# EAGLE board Bulk Board 3 (EAGLE 8.2.0)
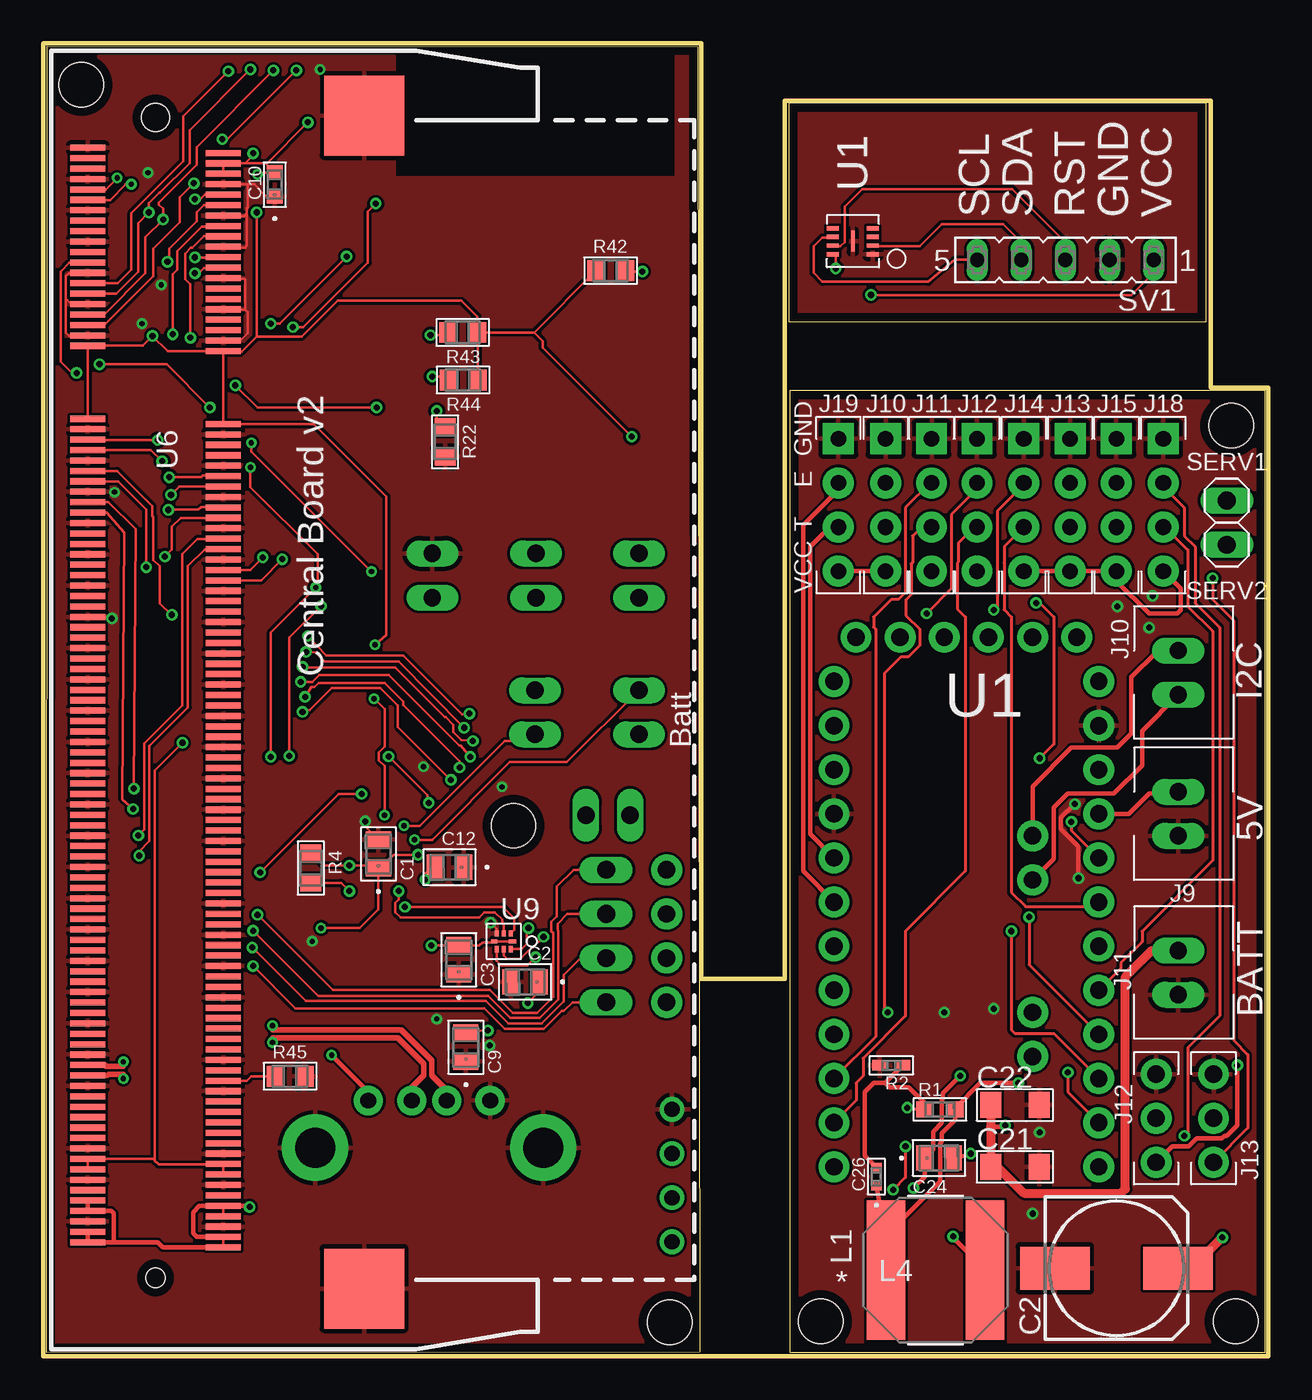
[diagram p0: board, top side]
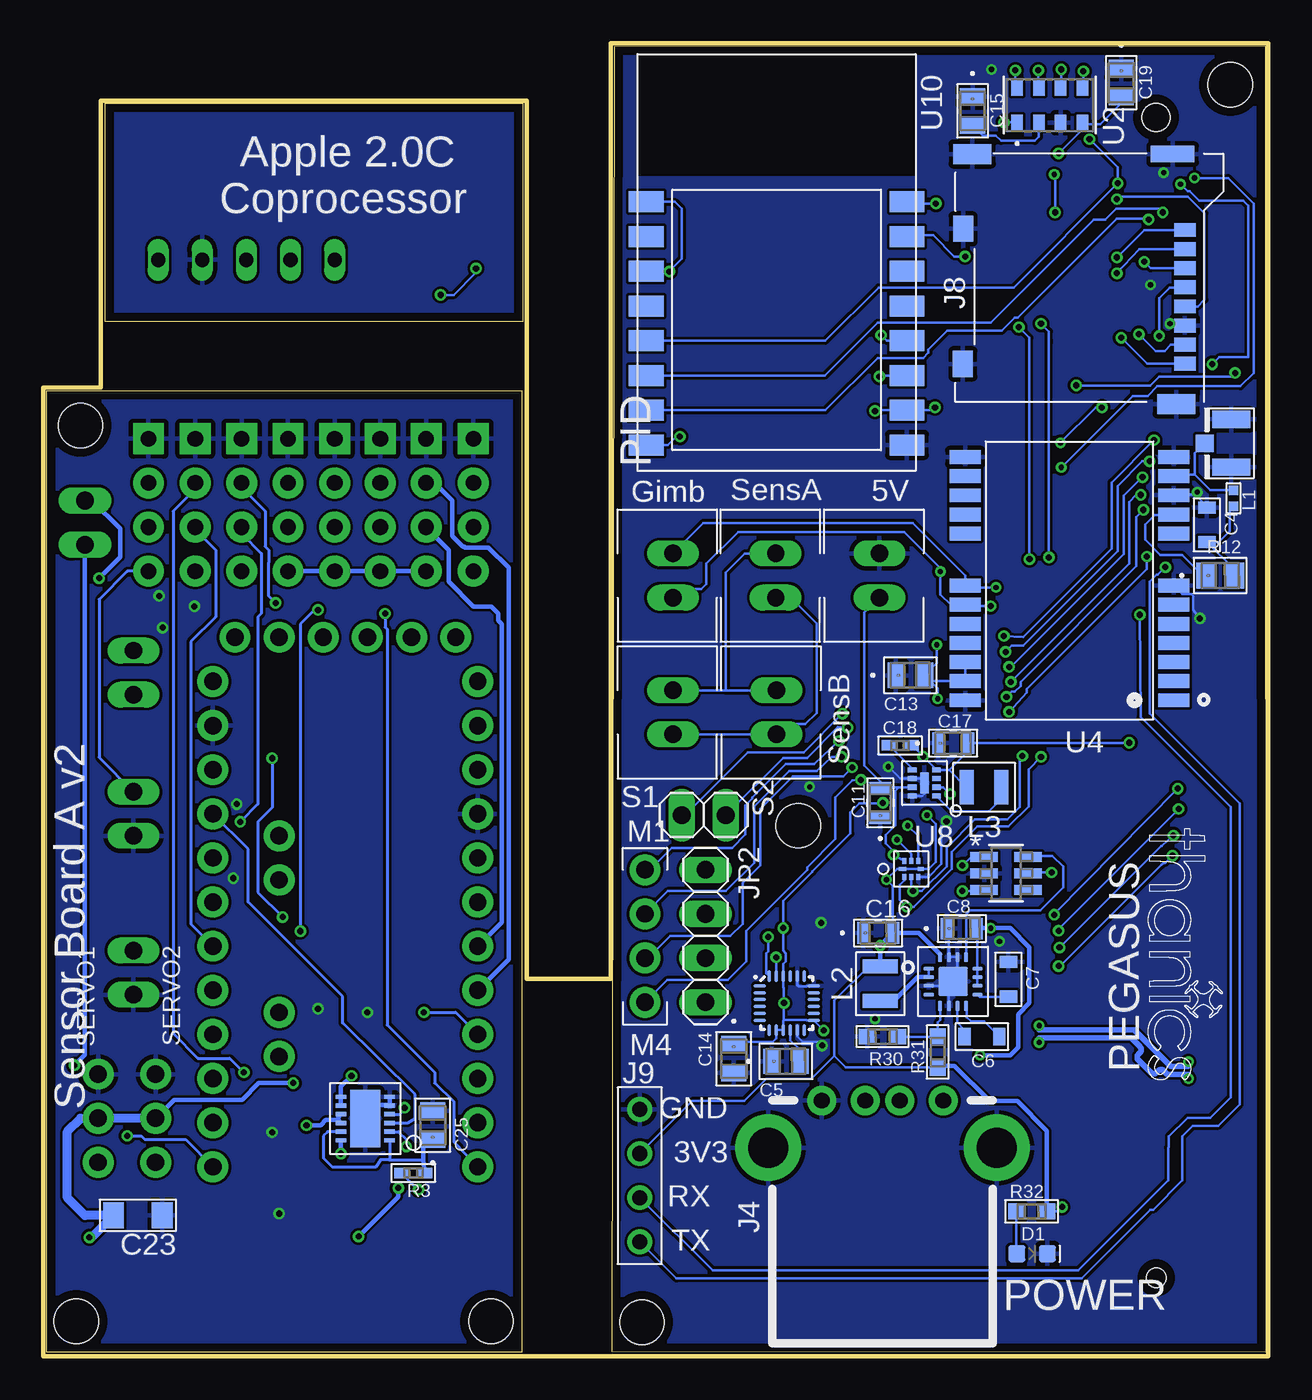
[diagram p1: board, bottom side, seen from below]

Size 70.48 x 75.56 mm. Coordinates in mm from the lower left corner, seen from the top.
Outline: 0.15,0.23 37.77,0.25 37.64,75.39 0.18,75.41 0.15,0.23
Outline: 42.95,0.23 70.31,0.23 70.31,55.59 42.95,55.59 42.95,0.23
Outline: 66.93,59.56 66.93,72.12 42.89,72.12 42.89,59.56 66.93,59.56
Outline: 0,0 70.48,0 70.48,55.75 67.18,55.75 67.18,72.26 42.67,72.26 42.67,21.72 37.85,21.72 37.85,75.56 0,75.56 0,0
Copper layers (1*16): Top 0.035mm / dielectric 1.6mm / Bottom 0.035mm
Design rules "Elecrow_2-layer_PCB_eagle_rule": minimum track width 6mil, minimum drill 12mil, track to track 6mil, track to pad 6mil, pad to pad 6mil, via to via 8mil, smd to smd 0mil, copper to edge 20mil, drill to drill 10mil, minimum pad ring 6mil, minimum via ring 6mil, stop-mask expansion 0mil, vias tented up to drill 100mil, thermal gap 10mil
Holes 2.54 mm at 36.04,1.96 27.05,30.53 2.18,73.18 68.61,2.01 68.35,53.57 44.73,2.01

## Footprints (pad centres in the part's own frame; a part is rotated, then mirrored left to right if it is on the bottom)
0805 = smd 0.965 x 1.448: 1 -0.826,0; 2 0.826,0
0603_CAPACITOR = smd 0.701 x 1.001: 1 -1.001,0; 2 1.001,0
G-21 = smd 0.711 x 1.245: 1 -0.851,0; 2 0.851,0
G-188-M = smd 0.813 x 0.914: 1 -0.699,0; 2 0.699,0
YAG_CC0805 = smd 0.965 x 1.448: 1 -0.826,0; 2 0.826,0
CC0402N-M = smd 0.864 x 0.61: 1 -0.635,0; 2 0.635,0
0810_POLCAP = smd 4 x 2.5: + 3.55,0; - -3.55,0
1206_MLCC = smd 1.2 x 1.5: P$1 -1.4,0; P$2 1.4,0
G-155-M = smd 0.559 x 0.61: 1 -0.521,0; 2 0.521,0
LED-0603 = smd 1 x 1: A -0.877,0; C 0.877,0
XH_CONNECTOR = drill 1.001 long: 1 -1.27,0; 2 1.27,0
USB_A_RECEPT = drill 0.92 pad 1.676: 1 3.5,0; 2 1,0; 3 -1,0; 4 -3.5,0 | drill 2.3 pad 3.81: 5 -6.57,-2.71; 6 6.57,-2.71
U.FL = smd 2.2 x 1: P$1 0,1.375; P$2 0,-1.375 | smd 1.05 x 1: P$3 1.525,0
MICROSD = smd 0.8 x 1.24: 1 -4.4,0; 2 -3.3,0; 3 -2.2,0; 4 -1.1,0; 5 0,0; 6 1.1,0; 7 2.2,0; 8 3.3,0 | smd 0.95 x 2.5: 9 -8.775,-0.7 | smd 1.15 x 2.2: 10 5.615,-0.5; 11 -8.775,-12.23 | smd 1.5 x 1.15: 12 -4.47,-12.755; 13 3.31,-12.775
4_PIN_TELE_CONNECTOR = drill 0.87 pad 1.422: 1 0,3.81; 2 0,1.27; 3 0,-1.27; 4 0,-3.81
HC-SR04_FOOTPRINT = drill 0.9 pad 1.778: ECHO 0,1.27; TRIG 0,-1.27; VCC 0,-3.81 | drill 0.9 pad 1.778 square: GND 0,3.81
SERVO_CONNECTOR = drill 1 pad 1.778: 1 0,2.54; 2 0,0; 3 0,-2.54
1X02 = drill 1.016 long: 1 -1.27,0; 2 1.27,0
1X04 = drill 1.016 long: 1 -3.81,0; 2 -1.27,0; 3 1.27,0; 4 3.81,0
0402_INDUCTOR = smd 0.525 x 0.55: P$1 -0.463,0; P$2 0.463,0
470NH_INDUCTOR = smd 0.8 x 2: P$1 -1,0; P$2 1,0
IND_BOURNS_SRN8040 = smd 2.21 x 8.001: 1 -2.857,0; 2 2.857,0
RC0603N-M = smd 0.965 x 0.914: 1 -0.876,0; 2 0.876,0
RC0402N-M = smd 0.864 x 0.61: 1 -0.66,0; 2 0.66,0
RC0805N = smd 1.006 x 1.2: 1 -0.853,0; 2 0.853,0
STA_RNCP0805-M = smd 1.118 x 1.499: 1 -0.826,0; 2 0.826,0
FE05-1 = drill 0.813 long: 1 -5.08,0; 2 -2.54,0; 3 0,0; 4 2.54,0; 5 5.08,0
QFN40P300X300X105-25N = smd 0.7 x 0.2: 1 -1.55,1; 2 -1.55,0.6; 3 -1.55,0.2; 4 -1.55,-0.2; 5 -1.55,-0.6; 6 -1.55,-1; 13 1.55,-1; 14 1.55,-0.6; 15 1.55,-0.2; 16 1.55,0.2; 17 1.55,0.6; 18 1.55,1 | smd 0.2 x 0.7: 7 -1,-1.55; 8 -0.6,-1.55; 9 -0.2,-1.55; 10 0.2,-1.55; 11 0.6,-1.55; 12 1,-1.55; 19 1,1.55; 20 0.6,1.55; 21 0.2,1.55; 22 -0.2,1.55; 23 -0.6,1.55; 24 -1,1.55
LGA8-M = smd 0.94 x 0.66: 1 -1.003,1.875; 2 -1.003,0.625; 3 -1.003,-0.625; 4 -1.003,-1.875; 5 1.003,-1.875; 6 1.003,-0.625; 7 1.003,0.625; 8 1.003,1.875
MF06A-M = smd 1.575 x 0.584: 1 -1.27,0.953; 2 -1.27,0; 3 -1.27,-0.953; 4 1.27,-0.953; 5 1.27,0; 6 1.27,0.953
NEO-M8 = smd 1.8 x 0.8: 1 6.4,-7.4; 2 6.4,-6.3; 3 6.4,-5.2; 4 6.4,-4.1; 5 6.4,-3; 6 6.4,-1.9; 7 6.4,-0.8; 8 6.4,2.2; 9 6.4,3.3; 10 6.4,4.4; 11 6.4,5.5; 12 6.4,6.6; 13 -5.6,6.6; 14 -5.6,5.5; 15 -5.6,4.4; 16 -5.6,3.3; 17 -5.6,2.2; 18 -5.6,-0.8; 19 -5.6,-1.9; 20 -5.6,-3; 21 -5.6,-4.1; 22 -5.6,-5.2; 23 -5.6,-6.3; 24 -5.6,-7.4
VQFN16 = smd 0.6 x 0.24: 1 -1.4,0.75; 2 -1.4,0.25; 3 -1.4,-0.25; 4 -1.4,-0.75; 9 1.4,-0.75; 10 1.4,-0.25; 11 1.4,0.25; 12 1.4,0.75 | smd 0.24 x 0.6: 5 -0.75,-1.4; 6 -0.25,-1.4; 7 0.25,-1.4; 8 0.75,-1.4; 13 0.75,1.4; 14 0.25,1.4; 15 -0.25,1.4; 16 -0.75,1.4 | smd 1.68 x 1.68: 17 0,0
SO-DIMM = smd 0.35 x 2: 1 -26.4,-3.9; 2 -26.1,3.9; 3 -25.8,-3.9; 4 -25.5,3.9; 5 -25.2,-3.9; 6 -24.9,3.9; 7 -24.6,-3.9; 8 -24.3,3.9; 9 -24,-3.9; 10 -23.7,3.9; 11 -23.4,-3.9; 12 -23.1,3.9; 13 -22.8,-3.9; 14 -22.5,3.9; 15 -22.2,-3.9; 16 -21.9,3.9; 17 -21.6,-3.9; 18 -21.3,3.9; 19 -21,-3.9; 20 -20.7,3.9; 21 -20.4,-3.9; 22 -20.1,3.9; 23 -19.8,-3.9; 24 -19.5,3.9; 25 -19.2,-3.9; 26 -18.9,3.9; 27 -18.6,-3.9; 28 -18.3,3.9; 29 -18,-3.9; 30 -17.7,3.9; 31 -17.4,-3.9; 32 -17.1,3.9; 33 -16.8,-3.9; 34 -16.5,3.9; 35 -16.2,-3.9; 36 -15.9,3.9; 37 -15.6,-3.9; 38 -15.3,3.9; 39 -15,-3.9; 40 -14.7,3.9; 41 -10.8,-3.9; 42 -10.5,3.9; 43 -10.2,-3.9; 44 -9.9,3.9; 45 -9.6,-3.9; 46 -9.3,3.9; 47 -9,-3.9; 48 -8.7,3.9; 49 -8.4,-3.9; 50 -8.1,3.9; 51 -7.8,-3.9; 52 -7.5,3.9; 53 -7.2,-3.9; 54 -6.9,3.9; 55 -6.6,-3.9; 56 -6.3,3.9; 57 -6,-3.9; 58 -5.7,3.9; 59 -5.4,-3.9; 60 -5.1,3.9; 61 -4.8,-3.9; 62 -4.5,3.9; 63 -4.2,-3.9; 64 -3.9,3.9; 65 -3.6,-3.9; 66 -3.3,3.9; 67 -3,-3.9; 68 -2.7,3.9; 69 -2.4,-3.9; 70 -2.1,3.9; 71 -1.8,-3.9; 72 -1.5,3.9; 73 -1.2,-3.9; 74 -0.9,3.9; 75 -0.6,-3.9; 76 -0.3,3.9; 77 0,-3.9; 78 0.3,3.9; 79 0.6,-3.9; 80 0.9,3.9; 81 1.2,-3.9; 82 1.5,3.9; 83 1.8,-3.9; 84 2.1,3.9; 85 2.4,-3.9; 86 2.7,3.9; 87 3,-3.9; 88 3.3,3.9; 89 3.6,-3.9; 90 3.9,3.9; 91 4.2,-3.9; 92 4.5,3.9; 93 4.8,-3.9; 94 5.1,3.9; 95 5.4,-3.9; 96 5.7,3.9; 97 6,-3.9; 98 6.3,3.9; 99 6.6,-3.9; 100 6.9,3.9; 101 7.2,-3.9; 102 7.5,3.9; 103 7.8,-3.9; 104 8.1,3.9; 105 8.4,-3.9; 106 8.7,3.9; 107 9,-3.9; 108 9.3,3.9; 109 9.6,-3.9; 110 9.9,3.9; 111 10.2,-3.9; 112 10.5,3.9; 113 10.8,-3.9; 114 11.1,3.9; 115 11.4,-3.9; 116 11.7,3.9; 117 12,-3.9; 118 12.3,3.9; 119 12.6,-3.9; 120 12.9,3.9; 121 13.2,-3.9; 122 13.5,3.9; 123 13.8,-3.9; 124 14.1,3.9; 125 14.4,-3.9; 126 14.7,3.9; 127 15,-3.9; 128 15.3,3.9; 129 15.6,-3.9; 130 15.9,3.9; 131 16.2,-3.9; 132 16.5,3.9; 133 16.8,-3.9; 134 17.1,3.9; 135 17.4,-3.9; 136 17.7,3.9; 137 18,-3.9; 138 18.3,3.9; 139 18.6,-3.9; 140 18.9,3.9; 141 19.2,-3.9; 142 19.5,3.9; 143 19.8,-3.9; 144 20.1,3.9; 145 20.4,-3.9; 146 20.7,3.9; 147 21,-3.9; 148 21.3,3.9; 149 21.6,-3.9; 150 21.9,3.9; 151 22.2,-3.9; 152 22.5,3.9; 153 22.8,-3.9; 154 23.1,3.9; 155 23.4,-3.9; 156 23.7,3.9; 157 24,-3.9; 158 24.3,3.9; 159 24.6,-3.9; 160 24.9,3.9; 161 25.2,-3.9; 162 25.5,3.9; 163 25.8,-3.9; 164 26.1,3.9; 165 26.4,-3.9; 166 26.7,3.9; 167 27,-3.9; 168 27.3,3.9; 169 27.6,-3.9; 170 27.9,3.9; 171 28.2,-3.9; 172 28.5,3.9; 173 28.8,-3.9; 174 29.1,3.9; 175 29.4,-3.9; 176 29.7,3.9; 177 30,-3.9; 178 30.3,3.9; 179 30.6,-3.9; 180 30.9,3.9; 181 31.2,-3.9; 182 31.5,3.9; 183 31.8,-3.9; 184 32.1,3.9; 185 32.4,-3.9; 186 32.7,3.9; 187 33,-3.9; 188 33.3,3.9; 189 33.6,-3.9; 190 33.9,3.9; 191 34.2,-3.9; 192 34.5,3.9; 193 34.8,-3.9; 194 35.1,3.9; 195 35.4,-3.9; 196 35.7,3.9; 197 36,-3.9; 198 36.3,3.9; 199 36.6,-3.9; 200 36.9,3.9 | smd 4.6 x 4.6: G1 -28.254,12; G2 39.27,12 | hole 1.6: -28.15,0 | hole 1.1: 38.65,0
MLF(ML)_8PIN = smd 0.5 x 0.3: 1 -0.7,0.75; 2 -0.7,0.25; 3 -0.7,-0.25; 4 -0.7,-0.75; 5 0.7,-0.75; 6 0.7,-0.25; 7 0.7,0.25; 8 0.7,0.75 | smd 0.5 x 1.2: EP 0,0
8-UMLP = smd 0.45 x 0.22: 1 -0.5,0 | smd 0.22 x 0.35: 2 -0.4,-0.45; 3 0,-0.45; 4 0.4,-0.45; 6 0.4,0.45; 7 0,0.45; 8 -0.4,0.45 | smd 0.35 x 0.22: 5 0.55,0
ESP-12 = smd 2 x 1.2: 1 -7.5,4.5; 2 -7.5,2.5; 3 -7.5,0.5; 4 -7.5,-1.5; 5 -7.5,-3.5; 6 -7.5,-5.5; 7 -7.5,-7.5; 8 -7.5,-9.5; 9 7.5,-9.5; 10 7.5,-7.5; 11 7.5,-5.5; 12 7.5,-3.5; 13 7.5,-1.5; 14 7.5,0.5; 15 7.5,2.5; 16 7.5,4.5
PRO-MINI-2 = drill 1 pad 1.778: A0 6.35,2.54; A1 6.35,0; A2 6.35,-2.54; A3 6.35,-5.08; A4 2.54,1.27; A5 2.54,3.81; A6 2.54,-8.89; A7 2.54,-6.35; D2 -8.89,2.54; D3 -8.89,0; D4 -8.89,-2.54; D5 -8.89,-5.08; D6 -8.89,-7.62; D7 -8.89,-10.16; D8 -8.89,-12.7; D9 -8.89,-15.24; D10 6.35,-15.24; D11 6.35,-12.7; D12 6.35,-10.16; D13 6.35,-7.62; DTR 5.08,15.24; GND 6.35,10.16; GND1 -8.89,5.08; GND2 -7.62,15.24; GND3 -5.08,15.24; RAW 6.35,12.7; RST 6.35,7.62; RST1 -8.89,7.62; RX1 -8.89,10.16; RX1-1 0,15.24; TX0 -8.89,12.7; TX0-1 2.54,15.24; VCC 6.35,5.08; VCC1 -2.54,15.24
12LD4X3DFN = smd 0.6 x 0.25: 1 -1.4,1.25; 2 -1.4,0.75; 3 -1.4,0.25; 4 -1.4,-0.25; 5 -1.4,-0.75; 6 -1.4,-1.25; 7 1.4,-1.25; 8 1.4,-0.75; 9 1.4,-0.25; 10 1.4,0.25; 11 1.4,0.75; 12 1.4,1.25 | smd 1.7 x 3.3: EP 0,0
PG-USON-8-1 = smd 0.7 x 0.25: 1 -1.15,0.75; 2 -1.15,0.25; 3 -1.15,-0.25; 4 -1.15,-0.75; 5 1.15,-0.75; 6 1.15,-0.25; 7 1.15,0.25; 8 1.15,0.75 | smd 0.2 x 1.2: 9 0,0
4_PIN_CONNECTOR = drill 1 pad 1.778: 1 0,3.81; 2 0,1.27; 3 0,-1.27; 4 0,-3.81

## Placement (x,y rotation side)
C1  0.1uF  [0805]  19.28,28.91 90 top
C2  0.1uF  [0805]  27.71,21.54 180 top
C3  0.1uF  [0805]  23.9,22.81 90 top
C4  10 nF  [0603_CAPACITOR]  3.53,47.85 270 bottom
C5  0.1uF  [0805]  27.76,16.97 0 bottom
C6  10nF  [0603_CAPACITOR]  16.48,18.39 180 bottom
C7  10nF  [0603_CAPACITOR]  14.96,21.69 270 bottom
C8  10uF  [G-21]  17.63,24.61 0 bottom
C9  0.1uF  [0805]  24.31,17.78 90 top
C10  2.2uF  [G-188-M]  13.31,67.44 90 top
C11  10uF  [G-21]  22.33,31.85 90 bottom
C12  0.1uF  [0805]  23.37,28.14 180 top
C13  0.1uF  [0805]  20.6,39.19 0 bottom
C14  0.1uF  [0805]  30.76,17.12 270 bottom
C15  1uF  [YAG_CC0805]  17.02,71.68 270 bottom
C16  22uF  [G-21]  22.45,24.36 0 bottom
C17  10uF  [G-21]  18.14,35.28 0 bottom
C18  560pF  [CC0402N-M]  21.18,35.15 0 bottom
C19  1uF  [YAG_CC0805]  8.46,73.3 270 bottom
C20  100uF  [0810_POLCAP]  61.75,5.05 0 top
C21  10uF  [1206_MLCC]  55.91,10.9 0 top
C22  10uF  [1206_MLCC]  55.91,14.45 0 top
C23  10uF  [1206_MLCC]  65.05,8.1 180 bottom
C24  0.1uF  [0805]  51.54,11.4 0 top
C25  0.1uF  [0805]  48.08,13.28 90 bottom
C26  16pF  [G-155-M]  47.93,10.34 90 top
D1  GREEN  [LED-0603]  13.59,5.89 0 bottom
J1  POWER_CONNECTOR  [XH_CONNECTOR]  22.38,44.93 90 bottom
J2  I2C_CONNECTOR  [XH_CONNECTOR]  28.35,44.93 90 bottom
J3  I2C_CONNECTOR  [XH_CONNECTOR]  34.26,37.06 90 bottom
J4  USB_A_RECEPT  [USB_A_RECEPT]  22.2,14.71 0 bottom
J5  U.FL  [U.FL]  2.13,52.55 180 bottom
J6  I2C_CONNECTOR  [XH_CONNECTOR]  28.3,37.06 90 bottom
J7  I2C_CONNECTOR  [XH_CONNECTOR]  34.26,44.93 90 bottom
J8  MICROSD  [MICROSD]  4.8,60.43 270 bottom
J9  4_PIN_TELE_CONNECTOR  [4_PIN_TELE_CONNECTOR]  36.17,10.39 180 bottom
J10  HC-SR04  [HC-SR04_FOOTPRINT]  48.46,49 0 top
J11  HC-SR04  [HC-SR04_FOOTPRINT]  51.1,49 0 top
J12  HC-SR04  [HC-SR04_FOOTPRINT]  53.72,49 0 top
J13  HC-SR04  [HC-SR04_FOOTPRINT]  59.08,49 0 top
J14  HC-SR04  [HC-SR04_FOOTPRINT]  56.41,49 0 top
J15  HC-SR04  [HC-SR04_FOOTPRINT]  61.75,49 0 top
J16  POWER_CONNECTOR  [XH_CONNECTOR]  65.3,31.22 270 top
J17  I2C_CONNECTOR  [XH_CONNECTOR]  65.3,39.34 270 top
J18  HC-SR04  [HC-SR04_FOOTPRINT]  64.44,49 0 top
J19  HC-SR04  [HC-SR04_FOOTPRINT]  45.75,49 0 top
J20  SERVO_CONNECTOR  [SERVO_CONNECTOR]  67.34,13.69 180 top
J21  SERVO_CONNECTOR  [SERVO_CONNECTOR]  64.03,13.69 180 top
J22  GIMBAL_POWER_CONNECTOR  [XH_CONNECTOR]  65.3,22.07 270 top
JP1  [1X02]  32.49,31.14 0 bottom
JP2  [1X04]  32.39,24.18 270 bottom
JP3  [1X02]  68.1,47.98 270 top
L1  27 nH  [0402_INDUCTOR]  2.01,49.38 270 bottom
L2  470nH  [470NH_INDUCTOR]  22.33,21.44 90 bottom
L3  470nH  [470NH_INDUCTOR]  16.36,32.74 180 bottom
L4  3.3uH  [IND_BOURNS_SRN8040]  51.33,4.95 0 top
R1  499k  [RC0603N-M]  51.59,14.2 0 top
R2  95.3k  [RC0402N-M]  48.79,16.74 180 top
R3  95.3k  [RC0402N-M]  49.2,10.54 180 bottom
R4  10k  [RC0805N]  15.39,28.09 270 top
R12  10  [STA_RNCP0805-M]  2.77,44.93 0 bottom
R22  10k  [RC0805N]  23.11,52.63 270 top
R30  160k  [RC0603N-M]  22.2,18.39 180 bottom
R31  499k  [RC0603N-M]  19.02,17.5 90 bottom
R32  20R  [RC0603N-M]  13.61,8.33 0 bottom
R42  10k  [RC0805N]  32.64,62.48 0 top
R43  10k  [RC0805N]  24.13,58.93 180 top
R44  10k  [RC0805N]  24.16,56.18 180 top
R45  10k  [RC0805N]  14.2,16.1 0 top
SV1  [FE05-1]  58.81,63.1 180 top
U1  [QFN40P300X300X105-25N]  27.71,20.32 0 bottom
U2  [LGA8-M]  12.57,72.01 90 bottom
U3  LM3880MF-1AA/NOPBMF06A-M  [MF06A-M]  15.09,27.79 0 bottom
U4  NEO-M8  [NEO-M8]  11.84,45.15 0 bottom
U5  TPS6209  [VQFN16]  18.14,21.56 0 bottom
U6  COMPUTE_MODULE  [SO-DIMM]  6.45,43.15 270 top
U7  MIC23050  [MLF(ML)_8PIN]  19.79,32.99 180 bottom
U8  [8-UMLP]  20.55,28.04 0 bottom
U9  [8-UMLP]  26.49,23.88 180 top
U10  [ESP-12]  28.3,61.95 0 bottom
U11  PRO-MINI-2  [PRO-MINI-2]  54.38,26.14 0 top
U$1  [12LD4X3DFN]  51.97,13.67 180 bottom
U$2  APPLE_2.0C_COPROCESSOR  [PG-USON-8-1]  46.58,64.17 180 top
U$12  4_PIN_CONNECTOR  [4_PIN_CONNECTOR]  35.86,24.18 0 bottom

## Library data of the parts
C1-C3 C5 C9 C12-C14 C24 C25 = 0.1uF X7R Ceramic Capacitor; COPYRIGHT: Copyright C 2015 Accelerated Designs. All rights reserved; MANUFACTURER_PART_NUMBER: 08055C104KAT2A; VENDOR: Vendor
C4 C6 C7 C20-C23 J1-J4 J6-J9 J16 J17 J20-J22 L1-L3 U5 U7-U9 U$1 U$2 U$12 = thanics_robotics
C8 C11 C17 = 10uF X5R Ceramic Capacitor; COPYRIGHT: Copyright C 2015 Accelerated Designs. All rights reserved; MANUFACTURER_PART_NUMBER: GRM21BR60J106ME19L; VENDOR: Vendor
C10 = 2.2uF X5R Capacitor; COPYRIGHT: Copyright C 2015 Accelerated Designs. All rights reserved; MANUFACTURER_PART_NUMBER: GRM188R61C225KE15J; VENDOR: Vendor
C15 C19 = 1uF X7R Ceramic Capacitor; COPYRIGHT: Copyright C 2015 Accelerated Designs. All rights reserved; MANUFACTURER_PART_NUMBER: CC0805KKX7R7BB105; VENDOR: Vendor
C16 = 22uF X5R Ceramic Capacitor; COPYRIGHT: Copyright C 2015 Accelerated Designs. All rights reserved; MANUFACTURER_PART_NUMBER: GRM21BR60J226ME39L; VENDOR: Vendor
C18 = 560pF-capacitor; MANUFACTURER_PART_NUMBER: CC0402KRX7R9BB561; VENDOR: Yageo
C26 = 16pF-capacitor; MANUFACTURER_PART_NUMBER: GRM1555C1H160JA01D; VENDOR: Murata
D1 = SparkFun-LED; PROD_ID: DIO-00821
J5 = SparkFun-Connectors; PROD_ID: CONN-09193; SF_ID: WRL-09144
J10-J15 J18 J19 = Ultrasonic Sensor HC-SR04
JP1-JP3 = pinhead
L4 = 3.3uH-inductor
R1 R31 = 499k-resistor; MANUFACTURER_PART_NUMBER: RC0603FR07499KL; VENDOR: Yageo
R2 R3 = 95.3k-resistor; MANUFACTURER_PART_NUMBER: RC0402FR0795K3L; VENDOR: Yageo
R4 R22 R42-R45 = 10k-resistor; CASE: 0805 2012 metric; COMPOSITION: Thin Film; COPYRIGHT: Copyright C 2015 Accelerated Designs. All rights reserved; DATASHEET: httpindustrial.panasonic.comwwwcgijvcr13pz.cgi?E+PZ+3+AOA0026+ERA6AEB103V+7+WW; DIGIKEYPARTNUMBER: P10KDATRND; HEIGHT: 0.024" 0.60mm; LEADSTYLE: Surface Mount SMD SMT; MANUFACTURER_PART_NUMBER: ERA6AEB103V; NUMBEROFTERMINATIONS: 2; PACKAGECASE: 0805 2012 Metric; PACKAGING: Tape &amp Reel TR; POWERWATTS: 0.125W 18W; QUANTITY_AVAILABLE: 225000; RESISTANCEINOHMS: 10.0K; RESISTANCEOHMS: 10K; SIZEDIMENSION: 0.079" L x 0.049" W 2.00mm x 1.25mm; TEMPERATURECOEFFICIENT: 25ppm°C; TOLERANCE: 0.1%; VENDOR: Panasonic; VOLTAGEWORKING: 100V
R12 = 10-resistor; COPYRIGHT: Copyright C 2015 Accelerated Designs. All rights reserved; MANUFACTURER_PART_NUMBER: RNCP0805FTD10R0; VENDOR: Vendor
R30 = 160k-resistor; MANUFACTURER_PART_NUMBER: RC0603FR07160KL; VENDOR: Yageo
R32 = 20-resistor; MANUFACTURER_PART_NUMBER: RC0603JR0720RL; VENDOR: Yageo
SV1 = con-lsta; OC_FARNELL: unknown; OC_NEWARK: unknown
U1 = ICM-20948-mpu
U2 = mpl115a1-barometer; MANUFACTURER_PART_NUMBER: mpl115a1; VENDOR: Freescale
U3 = LM3880MF; MANUFACTURER_PART_NUMBER: lm3880mf1aaNOPB; VENDOR: National Semiconductor
U4 = ubloxLib
U6 = raspberrypi_cm
U10 = adafruit
U11 = Arduino-clone

## Nets
1.8V: C2.1 C9.2 C14.1 C17.2 C18.2 L3.P$2 U1.8 U1.9 U1.13 U1.22 U6.183 U6.184 U6.185 U6.186 U7.4 U9.8
+3V3: C3.2 C10.2 C12.2 C13.2 C16.2 C19.2 J8.4 J9.3 L2.P$2 R31.1 R32.2 R42.1 R43.1 R44.1 U2.1 U2.4 U4.22 U4.23 U5.16 U6.4 U6.6 U6.39 U6.40 U6.41 U6.42 U6.191 U6.192 U6.193 U6.194 U6.197 U6.198 U6.199 U6.200 U8.1 U8.5 U9.1 U9.5 U10.8
+5V: C1.1 C8.2 C11.2 J1.1 J4.1 R4.1 U3.1 U5.10 U5.11 U5.12 U7.7 U8.8
+5V1: J10.VCC J11.VCC J12.VCC J13.VCC J14.VCC J15.VCC J16.1 J18.VCC J19.VCC U11.VCC U$1.3
ECHO1: J19.ECHO U11.D3
ECHO2: J10.ECHO U11.D5
ECHO3: J11.ECHO U11.D7
ECHO4: J12.ECHO U11.D9
ECHO5: J13.ECHO U11.D13
ECHO6: J14.ECHO U11.D12
ECHO7: J15.ECHO U11.D11
ECHO8: J18.ECHO U11.D10
EMMC_DISABLE_N: U6.2
ENCODER2_A: U6.75
ENCODER2_B: U6.77
GND: C1.2 C2.2 C3.1 C4.1 C5.1 C7.1 C8.1 C9.1 C10.1 C11.1 C12.1 C13.1 C14.2 C15.1 C16.1 C17.1 C19.1 D1.C J1.2 J4.4 J4.5 J4.6 J5.P$1 J5.P$2 J8.6 J8.9 J8.10 J8.11 J8.12 J8.13 J9.4 R22.2 R30.2 R45.2 U1.11 U1.18 U1.20 U2.3 U3.2 U4.7 U4.10 U4.12 U4.13 U4.24 U5.3 U5.6 U5.14 U5.15 U5.17 U6.1 U6.7 U6.8 U6.13 U6.14 U6.19 U6.20 U6.25 U6.26 U6.31 U6.32 U6.37 U6.38 U6.43 U6.44 U6.49 U6.50 U6.55 U6.56 U6.61 U6.62 U6.67 U6.68 U6.73 U6.74 U6.79 U6.80 U6.85 U6.86 U6.91 U6.92 U6.97 U6.98 U6.103 U6.104 U6.109 U6.110 U6.115 U6.116 U6.121 U6.122 U6.127 U6.133 U6.134 U6.139 U6.140 U6.145 U6.146 U6.151 U6.152 U6.157 U6.163 U6.164 U6.169 U6.170 U6.181 U6.182 U6.187 U6.188 U6.195 U6.196 U6.G1 U6.G2 U7.6 U7.8 U7.EP U8.4 U9.4 U10.9
GND1: C20.- C21.P$2 C22.P$2 C23.P$1 C25.2 J10.GND J11.GND J12.GND J13.GND J14.GND J15.GND J16.2 J18.GND J19.GND J20.3 J21.3 J22.2 R2.2 U11.GND U11.GND1 U$1.5 U$1.6 U$1.EP
GND2: SV1.2 U$2.1 U$2.9
GPIO18: U6.63
GPIO19: U6.65
GPIO21: U6.71
GPIO25: U6.83
I2C_SCL: J7.1 U4.19 U6.11 U8.3 U9.3
I2C_SCL_1V8: U1.23 U9.6
I2C_SCL_5V: J2.1 J3.1 J6.1 U8.6
I2C_SDA: J7.2 U4.18 U6.9 U8.2 U9.2
I2C_SDA_1V8: U1.24 U9.7
I2C_SDA_5V: J2.2 J3.2 J6.2 U8.7
LED1: JP2.1 U6.57
LED2: JP2.2 U6.59
LED3: JP2.3 U6.64
LED4: JP2.4 U6.66
MOTOR1: U6.52 U$12.1
MOTOR2: U6.54 U$12.2
MOTOR3: U6.58 U$12.3
MOTOR4: U6.60 U$12.4
N$1: J5.P$3 L1.P$1 U4.11
N$2: C6.2 U5.7
N$3: C6.1 U5.8
N$4: D1.A R32.1
N$5: U3.6 U5.13
N$6: U3.5 U7.2
N$7: C26.2 R1.1 R2.1 U$1.4
N$8: C24.2 U$1.12
N$9: C24.1 L4.2 U$1.7 U$1.8
N$10: R3.2 U$1.2
N$11: C5.2 U1.10
N$12: C15.2 U2.2
N$13: R12.1 U4.9
N$26: C4.2 L1.P$2 R12.2
N$29: C7.2 U5.9
N$30: L2.P$1 U5.1 U5.2
N$32: L3.P$1 U7.1
N$33: R42.2 U10.1 U10.3
N$45: R43.2 U10.12
N$46: R30.1 R31.2 U5.5
N$48: C18.1 U7.5
N$51: R44.2 U10.11
N$53: R45.1 U6.168
POWER_SEQ_EN: R4.2 U3.3
RST: SV1.3 U$2.7
SCL: J17.1 U11.A5
SCL1: SV1.5 U$2.6
SDA: J17.2 U11.A4
SDA1: SV1.4 U$2.2
SDX_CLK: J8.5 U6.10
SDX_CMD: J8.3 U6.12
SDX_D0: J8.7 U6.16
SDX_D1: J8.8 U6.18
SDX_D2: J8.1 U6.22
SDX_D3: J8.2 U6.24
SERVO1: JP1.1 U6.45
SERVO2: JP1.2 U6.47
SERVO3: J21.1 JP3.2
SERVO4: J20.1 JP3.1
SPI_CS0: U2.5 U6.27
SPI_CS1: R22.1 U6.23 U10.10
SPI_MISO: U2.6 U6.29 U10.6
SPI_MOSI: U2.7 U6.33 U10.7
SPI_SCLK: U2.8 U6.35 U10.5
TRIG1: J19.TRIG U11.D2
TRIG2: J10.TRIG U11.D4
TRIG3: J11.TRIG U11.D6
TRIG4: J12.TRIG U11.D8
TRIG5: J13.TRIG U11.A0
TRIG6: J14.TRIG U11.A1
TRIG7: J15.TRIG U11.A2
TRIG8: J18.TRIG U11.A3
UART2_RX: U6.72 U10.16
UART2_TX: U6.70 U10.15
UART_RX: J9.1 U6.53
UART_TX: J9.2 U6.51
USB_D_N: J4.2 U6.167
USB_D_P: J4.3 U6.165
V_BATT: C21.P$1 C22.P$1 J22.1 U$1.9 U$1.10
VCC: SV1.1 U$2.8
VDD: C25.1 R3.1 U$1.1 U$1.11
VOUT: C20.+ C23.P$2 C26.1 J20.2 J21.2 L4.1 R1.2

## Tracks (layer width: path | path; a pad name or v marks a point on that pad's centre or on a via)
1.8V  (via drill 0.35)
  Top 0.152: U6.185 U6.183 6.3,11.36 6.4,11.25 | U6.186 U6.184 10.32,11.02 6.63,11.02 6.4,11.25 | 6.4,11.25 6.4,33.71 v8,35.31 | C9.2 25.01,18.71 v25.58,18.74 | C2.1 28.54,20.99 v27.87,20.32 | U9.8 27.52,23.43 27.81,23.72 27.81,24.54 v27.91,24.64 | v22.17,31.85 22.07,32.31 v19.86,34.52
  Bottom 0.152: L3.P$2 17.37,32.74 18.36,33.73 | 18.36,33.73 19.07,33.73 U7.4 v19.86,34.52 20.5,35.15 C18.2 | C17.2 17.29,34.81 18.36,33.73 | 17.26,35.31 C17.2 | C17.2 16.41,35.28 15.52,35.31 v8,35.31 | v25.58,18.74 v25.59,18.74 U1.13 26.55,19.32 26.57,19.35 27.87,19.35 | C14.1 30.62,18.08 28.52,18.08 28.31,18.3 U1.8 U1.9 27.91,19.3 27.87,19.35 | 27.87,19.35 v27.87,20.32 27.87,21.19 27.91,21.23 U1.22 27.91,22.58 27.77,22.73 27.77,23.19 27.91,23.34 v27.91,24.64 27.91,26.19 26.24,27.86 26.24,27.89 24.05,30.07 24.05,31.29 23.55,31.8 22.17,31.8 v22.17,31.85
+3V3  (via drill 0.3, 0.35)
  Top 0.152: U6.194 U6.192 10.33,8.64 9.63,8.64 | 2.55,7.06 U6.197 | U6.198 U6.200 | 8.97,8.64 9.07,8.64 | v12.07,69.24 12.07,69.14 11.61,68.68 | 11.61,68.68 10.38,68.68 U6.4 U6.6 | 11.61,68.68 12.76,68.68 | 12.76,68.68 C10.2 12.43,68.13 v12.32,68.02 | 12.76,68.68 12.88,68.68 v15.21,71.02 | U6.40 7.14,57.86 v6.27,58.73 5.7,58.16 U6.39 U6.41 | 12.27,58.67 11.41,57.81 10.4,57.81 U6.40 | 12.27,58.67 14.86,58.67 16.94,60.76 24.05,60.76 24.97,59.84 24.97,58.94 R43.1 | R43.1 24.98,56.21 R44.1 | 28.23,58.93 R43.1 | 28.23,58.93 R42.1 | U6.40 U6.42 15.56,53.66 19.74,49.48 19.74,41.5 v19.07,40.95 | 28.23,58.93 28.73,58.43 28.73,58.06 v33.86,52.93 | v21.97,27.43 21.97,27.77 C12.2 | v19.02,37.85 19.63,37.24 19.63,35.08 19.31,34.75 19.31,34.29 19.63,33.96 v19.63,31.14 | U9.1 U9.5 25.9,23.83 25.89,23.83 25.88,23.82 25.27,23.82 25.08,23.63 C3.2 v22.33,23.63 | 12.27,58.67 v12.27,65.84
  Top 0.254: U6.192 11.79,8.66 v11.86,8.59 | U6.198 8.82,6.85 8.61,7.06 8.61,8.28 8.97,8.64 | 9.07,8.64 9.63,8.64 | U6.200 6.88,6.25 6.58,6.55 4.04,6.55 | 4.04,6.55 U6.199 2.55,7.06 | 4.04,6.55 4.04,8.23 3.91,8.36 U6.193 U6.191
  Bottom 0.152: 18.89,23.13 U5.16 | R32.2 12.12,8.33 v11.86,8.59 | C19.2 8.46,72.14 9.68,70.92 10.61,70.92 U2.4 10.7,70.61 v12.07,69.24 | v15.21,71.02 14.46,71.02 U2.1 | v6.27,58.73 6.27,60.91 5.66,61.52 J8.4 | C13.2 19.43,38.85 U4.23 U4.22 | U10.8 34.54,52.45 34.06,52.93 v33.86,52.93 | v19.07,40.95 19.07,39.89 C13.2 | C16.2 21.6,27.06 v21.97,27.43 21.36,28.04 U8.1 U8.5 19.53,28.04 19.13,28.45 19.13,30.63 v19.63,31.14 | v19.02,37.85 19.02,38.44 C13.2 | v12.27,65.84 12.27,67.97 v12.32,68.02 | L2.P$2 23,22.44 24.97,20.47 24.97,17.27 | 24.97,17.27 26.29,15.95 28.88,15.95 30.15,14.68 33.15,14.68 J9.3 | R31.1 24.32,16.62 24.97,17.27
  Bottom 0.254: R32.2 12.74,12.97 14.45,14.68 16.03,14.68 18.06,16.71 18.94,16.71 R31.1 | 18.89,23.13 20.12,24.36 C16.2 v22.33,23.63 L2.P$2
+5V  (via drill 0.3, 0.35)
  Top 0.152: C1.1 19.11,28.24 v17.6,28.24 16.09,28.24 R4.1 | C1.1 19.28,25.7 18.21,24.64 v15.98,24.64 | v21.56,28.85 20.15,28.85 C1.1
  Top 0.254: J4.1 18.7,15.21 v16.59,17.32
  Bottom 0.152: 21.26,32.75 U7.7 | 21.26,32.75 22.28,32.75 C11.2 22.33,33.07 23.24,33.98 23.24,42.8 J1.1 | U3.1 17.11,28.74 v17.6,28.24 | U5.10 U5.11 U5.12 16.74,24.57 C8.2 | U8.8 | U8.8 v21.56,28.85 21.56,29.06 22.02,29.52 22.02,30 21.48,30.55 21.48,32.53 21.26,32.75
  Bottom 0.254: v16.59,17.32 14.86,17.32 14.4,17.78 14.4,19.66 13.74,20.32 13.74,23.52 14.86,24.64 v15.98,24.64 16.75,24.64 C8.2
+5V1
  Top 0.254: U11.VCC 62.46,31.22 63.63,32.39 65.2,32.39 J16.1 | J19.VCC J10.VCC | J14.VCC J13.VCC J15.VCC 61.75,44.63 63.63,42.75 65.25,42.75 65.46,42.95 65.46,44.17 J18.VCC
  Bottom 0.178: U11.VCC 58.7,29.18 58.7,26.14 53.26,20.7 53.26,19.18 49.1,15.06 49.1,13.69 49.52,13.42 U$1.3 | J18.VCC 65.66,45.19 67.28,43.56 67.28,34.47 J16.1
  Bottom 0.254: J10.VCC J11.VCC J12.VCC J14.VCC
ECHO1
  Top 0.254: J19.ECHO 45.75,49.86 43.71,47.83 43.71,27.91 U11.D3
ECHO2
  Bottom 0.254: U11.D5 43.71,22.83 43.71,45.39 44.88,46.56 46.23,46.56 46.28,46.61 46.36,46.61 46.97,47.22 46.97,49.25 47.78,50.06 48.26,50.06 J10.ECHO
ECHO3
  Top 0.178: J11.ECHO 51.03,50.27 49.61,48.84 49.61,43.97 49.2,43.56 48.79,43.56 47.78,42.55 47.78,41.96 47.89,41.85 47.89,18.38 U11.D7
ECHO4  (via drill 0.35)
  Top 0.178: J12.ECHO 53.72,49.91 52.25,48.44 52.25,44.17 v50.83,42.75
  Bottom 0.178: v50.83,42.75 50.83,41.96 50.71,41.85 50.71,19.06 47.98,16.33 47.98,15.72 46.86,14.66 46.86,12.32 U11.D9
ECHO5  (via drill 0.35)
  Top 0.178: v57.12,43.36 57.33,43.36 58.14,42.55 58.14,35.23 v57.33,34.42 | v56.72,25.27 56.72,22.53 U11.D13
  Bottom 0.178: J13.ECHO 59.08,49.99 57.73,48.64 57.73,46.61 57.53,46.41 57.53,45.67 57.54,45.66 57.54,43.78 v57.12,43.36 | v57.33,34.42 57.33,31.57 58.14,30.76 58.14,26.7 v56.72,25.27
ECHO6  (via drill 0.35)
  Top 0.178: J14.ECHO 56.41,50.16 54.89,48.64 54.89,43.16 v54.69,42.95 | v55.7,24.46 55.7,18.77 55.91,18.57 58.14,18.57 U11.D12
  Bottom 0.178: v54.69,42.95 54.89,42.95 55.7,42.14 v55.7,24.46
ECHO7  (via drill 0.35)
  Top 0.178: v58.95,16.33 58.95,15.21 U11.D11
  Bottom 0.178: J15.ECHO 61.75,49.91 63.02,48.64 63.02,18.57 61.6,17.14 59.77,17.14 v58.95,16.33
ECHO8  (via drill 0.35)
  Top 0.178: J18.ECHO 64.44,50.06 65.66,48.84 65.66,47.22 66.27,46.61 66.27,43.36 67.69,41.94 67.69,19.58 65.86,17.75 65.86,12.88 v65.66,12.68
  Bottom 0.178: v65.66,12.68 64.85,12.68 64.64,12.47 62.31,12.47 U11.D10
GND  (via drill 0.3, 0.35)
  Top 0.152: U6.38 11.34,58.46 11.76,58.88 11.76,60.1 11.61,60.25 | 11.61,60.25 U6.32 | U6.8 11.76,67.45 | 11.76,67.45 12.12,67.45 12.78,66.8 13.25,66.8 C10.1 | 11.61,60.25 11.61,61.98 11.56,62.03 10.38,62.03 U6.26 | v18.52,30.79 18.52,30.49 C1.2 | 11.76,67.45 11.76,66.11 11.71,66.07 11.71,65.79 | 11.71,65.79 11.56,65.63 10.37,65.63 U6.14 | 11.71,65.79 11.71,63.91 11.61,63.8 10.4,63.8 U6.20 | U9.4 26.09,24.58 v25.73,24.94 | U6.79 3.85,42.55 v3.94,42.47 | U6.25 1.47,62.36 1.29,62.18 1.29,60.86 | 1.29,60.86 1.37,60.78 1.65,60.5 2.5,60.5 U6.31 | 1.29,60.86 1.29,58.93 1.5,58.73 2.52,58.73 U6.37
  Bottom 0.152: U7.8 19.9,32.25 19.79,32.36 U7.EP 20.04,33.25 U7.6 21.18,33.25 v21.87,33.93 | U5.6 18.39,21.31 | U5.3 18.39,21.31 | 18.39,21.31 U5.17 17.89,21.81 U5.14 U5.15 18.39,24.52 C8.1 | C4.1 3.53,48.92 4.19,49.58 5.41,49.58 U4.10 | J8.6 5.55,59.33 v5.66,59.44 | U1.18 26.55,21.32 26.57,21.29 27.01,21.29 27.05,21.34 27.1,21.34 U1.20 | U1.11 27.11,18.4 26.8,18.08 25.88,18.08 v25.68,17.88 | U8.4 19.55,27.59 18.82,28.32 18.82,30.48 v18.52,30.79 | v3.94,42.47 4.31,42.94 4.31,43.75 4.44,43.88 4.96,43.88 U4.7
  other vias: 15.47,23.88 26.39,32.77 22.63,19.41 6.78,61.67 6.02,68.12 4.09,49.73 15.93,74.07
  pour Top: 0.18,75.34 37.77,75.34 37.77,0.3 0.18,0.3
  pour Bottom: 0.23,75.39 37.77,75.39 37.77,0.25 0.23,0.25
GND1  (via drill 0.35)
  Top 0.254: v59.56,27.51 59.56,29.32 58.55,30.34 58.55,31.01 58.91,31.37 58.95,31.37 v59.36,31.77
  Bottom 0.254: U$1.EP 51.97,13.82 51.33,14.45 50.6,14.45 U$1.5 U$1.6
  other vias: 54.69,19.99 51.84,19.79 57.33,12.88 56.92,8.2 61.8,43.15 63.63,41.94 63.83,43.76
  pour Top: 43.05,55.6 70.38,55.6 70.38,0.23 43.05,0.23
  pour Bottom: 43,55.55 70.28,55.55 70.28,0.23 43,0.23
GND2
  pour Top: 42.8,59.56 42.8,72.01 66.93,72.01 66.93,59.56
  pour Bottom: 42.8,59.56 42.8,72.01 66.93,72.01 66.93,59.56
I2C_SCL  (via drill 0.3, 0.35)
  Top 0.152: v11.96,52.58 11.96,52.07 v18.87,45.16 | v5.05,67.46 4.75,67.46 3.83,66.55 2.56,66.55 U6.11 | v14.15,34.54 14.15,41.35 v15.98,43.18 | v3.23,57.1 7.09,57.1 v9.58,54.61 | v20.45,26.77 20.45,26.29 20.25,26.09 20.25,25.55 20.55,25.25 25.07,25.25 25.38,25.55 25.98,25.55 26.39,25.15 26.39,24.99 26.49,24.89 U9.3
  Bottom 0.152: J7.1 33.78,44.15 32.64,44.15 32.33,44.45 32.33,45.62 30.5,47.45 20.95,47.45 18.87,45.36 v18.87,45.16 18.87,43.84 18.28,43.25 U4.19 17.36,43.18 v15.98,43.18 | v5.05,67.46 4.65,67.06 4.52,67.06 3.98,66.51 1.44,66.51 1.15,66.22 1.15,57.5 2.82,57.5 v3.23,57.1 | U8.3 20.55,27.08 20.45,26.97 v20.45,26.77 19.94,26.77 18.52,28.2 18.52,29.26 16.89,30.89 15.01,30.89 14.3,31.6 14.3,34.39 v14.15,34.54 | v9.58,54.61 9.93,54.61 v11.96,52.58
I2C_SCL_1V8  (via drill 0.35)
  Top 0.152: U9.6 26.09,22.75 26.35,22.49 27.85,22.49 v28.32,22.96
  Bottom 0.152: v28.32,22.96 28.32,21.88 U1.23
I2C_SCL_5V  (via drill 0.3)
  Top 0.152: v20.75,30.53 21.67,30.53 26.54,35.41 27.91,35.41 J6.1
  Bottom 0.152: 28.78,35.79 J3.1 | 28.78,35.79 J6.1 | J2.1 27.48,43.66 25.98,42.16 25.98,37.03 26.64,36.37 28.19,36.37 28.78,35.79 | U8.6 20.15,29.93 v20.75,30.53
I2C_SDA  (via drill 0.3, 0.35)
  Top 0.152: 1.65,67.16 U6.9 3.58,67.16 v4.24,67.82 | v11.91,51.16 11.91,50.04 15.77,46.18 15.77,44.25 15.72,44.2 v15.67,44.25 13.08,41.66 v13.08,34.49 | U9.2 27.1,24.54 27.1,25.2 26.44,25.86 v20.8,25.86
  Bottom 0.152: J7.2 32.51,47.96 20.45,47.96 17.44,44.94 U4.18 17.33,44.25 v15.67,44.25 | v4.24,67.82 2.31,67.82 0.84,66.34 0.84,60.17 0.84,56.64 | U8.2 20.95,27.39 21.21,27.13 21.21,26.26 v20.8,25.86 20.4,25.86 18.21,28.04 18.21,29.01 16.74,30.48 14.96,30.48 13.79,31.65 13.79,33.78 v13.08,34.49 | 0.84,56.64 | 0.84,56.64 0.84,56.59 1.6,55.83 6.38,55.83 6.93,55.27 7.8,55.27 v11.91,51.16
I2C_SDA_1V8  (via drill 0.35)
  Top 0.152: U9.7 26.49,23.06 26.7,22.86 27.43,22.86 28.09,23.52 28.17,23.52 v28.78,24.13
  Bottom 0.152: v28.78,24.13 28.78,23.29 28.88,23.19 28.88,22.04 U1.24
I2C_SDA_5V  (via drill 0.3)
  Top 0.152: v21.36,29.72 22.38,29.72 26.85,34.19 30.12,34.19 J3.2
  Bottom 0.152: 31.27,38.33 J3.2 | 31.27,38.33 J6.2 | J2.2 30.12,46.2 31.22,45.11 31.22,38.38 31.27,38.33 | U8.7 20.55,28.9 v21.36,29.72
LED1  (via drill 0.35)
  Top 0.152: JP2.1 30.5,27.99 29.54,27.03 29.54,25.3 29.23,24.99 29.23,24.46 29.33,24.36 29.33,20.67 28.42,19.76 27,19.76 25.68,21.08 16.64,21.08 v12.32,25.4 | v5.21,32.66 5.31,47.6 3.73,49.17 2.57,49.17 U6.57
  Bottom 0.152: v12.32,25.4 12.32,25.45 v5.21,32.66
LED2  (via drill 0.35)
  Top 0.152: JP2.2 30.15,25.45 29.59,24.89 29.59,24.54 29.64,24.49 29.64,20.55 28.55,19.46 26.87,19.46 25.59,20.74 15.81,20.74 v12.07,24.49 | v5.16,31.5 4.55,32.05 4.65,47.4 3.63,48.57 2.56,48.57 U6.59
  Bottom 0.152: v12.07,24.49 12.07,24.59 v5.16,31.5
LED3  (via drill 0.35)
  Top 0.152: JP2.3 30.91,22.91 29.94,21.94 29.94,20.42 28.67,19.15 26.75,19.15 25.46,20.43 15.1,20.43 v12.01,23.52 | U6.64 10.34,47.04 8.87,47.04 7.99,46.16 7.99,37.45 5.79,35.25 5.79,30.3 v5.46,29.97
  Bottom 0.152: v12.01,23.52 6.17,29.36 6.12,29.36 v5.46,29.97
LED4  (via drill 0.35)
  Top 0.152: JP2.4 30.45,20.37 29.95,19.86 29.82,19.86 28.8,18.85 26.54,18.85 25.38,20.02 14.5,20.02 v12.07,22.45 | v5.51,28.8 5.51,29.06 6.1,29.64 6.1,35.13 8.31,37.34 8.31,45.47 9.27,46.43 10.33,46.43 U6.66
  Bottom 0.152: v12.07,22.45 11.96,22.45 6.15,28.27 6.02,28.4 5.92,28.4 v5.51,28.8
MOTOR1  (via drill 0.35)
  Top 0.152: v24.71,35.41 24.05,35.46 23.6,35.92 23.6,36.32 23.14,36.78 23.09,36.78 20.24,39.62 14.96,39.62 v14.91,39.68 | v7.24,50.6 9.07,50.6 9.17,50.7 10.31,50.7 U6.52
  Bottom 0.152: U$12.1 35.59,27.99 34.32,29.26 30.86,29.26 30.1,30.02 30.1,31.7 29.69,32.11 29.69,32.16 27.76,34.09 26.14,34.09 v24.71,35.41 | v14.91,39.68 14.81,39.68 8.31,46.18 8.31,49.53 v7.24,50.6
MOTOR2  (via drill 0.35)
  Top 0.152: U6.54 7.81,50.05 v7.34,49.58 | v14.81,38.81 15.47,38.81 15.88,39.22 19.86,39.22 23.93,35.15 24,35.15 v24.56,34.49
  Bottom 0.152: v7.34,49.58 7.59,49.58 8,49.17 8,45.62 v14.81,38.81 | v24.56,34.49 25.12,34.49 25.98,33.68 27.56,33.68 29.59,31.65 29.59,28.4 31.22,26.77 34.54,26.77 U$12.2
MOTOR3  (via drill 0.35)
  Top 0.152: v23.95,33.88 23.95,34.24 20.7,37.49 20.7,37.69 19.63,38.76 15.85,38.76 15.6,38.51 15.42,38.51 v15.06,37.95 | v7.19,48.72 8.92,48.72 9.07,48.87 10.34,48.87 U6.58
  Bottom 0.152: U$12.3 35.69,22.91 34.42,24.18 30.96,24.18 30.25,24.89 30.25,27.23 29.23,28.24 29.23,31.5 27.36,33.38 24.46,33.38 v23.95,33.88 | v15.06,37.95 14.76,38.26 14.58,38.26 14.25,38.58 14.25,38.81 7.59,45.47 7.59,48.31 v7.19,48.72
MOTOR4  (via drill 0.35)
  Top 0.152: U6.60 7.89,48.26 7.39,47.75 7.39,46.43 v6.98,46.03 | v14.91,37.08 15.32,37.19 16.59,38.46 19.38,38.46 20.4,37.44 20.4,36.22 v23.44,33.17
  Bottom 0.152: v6.98,46.03 6.98,45.31 13.89,38.41 13.89,38.2 v14.91,37.08 | v23.44,33.17 23.95,33.12 24.92,32.16 24.92,29.77 26.54,28.14 26.54,27.99 30.05,24.49 30.05,22.71 31.11,21.64 34.6,21.64 U$12.4
N$1
  Bottom 0.152: L1.P$1 3.33,49.84 4.24,50.75 | 4.24,50.75 5.34,50.75 U4.11 | 4.24,50.75 4.24,51.97 J5.P$3
N$2
  Bottom 0.152: C6.2 17.48,18.78 17.91,19.2 17.91,20.14 U5.7
N$3
  Bottom 0.152: C6.1 15.48,18.4 16.33,19.25 17.09,19.25 17.35,19.51 17.35,20.13 U5.8
N$4
  Bottom 0.152: R32.1 14.49,5.92 D1.A
N$5
  Bottom 0.152: U5.13 17.39,25.41 17.14,25.65 13.13,25.65 11.81,26.97 11.81,28.19 12.42,28.8 13.75,28.8 U3.6
N$6  (via drill 0.35)
  Top 0.152: v18.31,32.36 16.99,32.36 v12.47,27.84
  Bottom 0.152: U7.2 18.7,32.75 v18.31,32.36 | v12.47,27.84 13.77,27.84 U3.5
N$7  (via drill 0.35)
  Top 0.178: R1.1 49.81,14.2 v49.71,14.3
  Top 0.254: 48.44,15.72 47.78,15.72 47.27,15.21 47.27,11.52 C26.2 | 48.44,15.72 R2.1 | R1.1 50.71,14.57 49.81,15.47 48.69,15.47 48.44,15.72
  Bottom 0.178: v49.71,14.3 49.81,14.1 50.01,13.89 50.54,13.89 U$1.4
N$8  (via drill 0.35)
  Top 0.254: C24.2 53.16,11.56 v53.37,11.66
  Bottom 0.254: v53.37,11.66 U$1.12
N$9  (via drill 0.35)
  Top 0.254: v52.76,16.13 51.74,15.11 51.74,14.81 51.7,14.77 51.7,13.41 51.19,12.91 51.19,11.89 C24.1 50.71,10.33 v50.06,9.68 | v52.35,6.88 52.35,6.79 L4.2
  Bottom 0.254: U$1.8 U$1.7 53.37,15.52 v52.76,16.13 | v50.06,9.68 50.06,9.17 v52.35,6.88
N$10  (via drill 0.35)
  Top 0.178: v49.61,12.07 49.61,10.29 v48.9,9.58
  Bottom 0.178: R3.2 49.4,10.03 v48.9,9.58 | 50.56,12.93 U$1.2 50.05,12.92 49.61,12.47 v49.61,12.07
N$11
  Bottom 0.152: C5.2 26.94,17.61 27.51,18.19 U1.10
N$12
  Bottom 0.152: U2.2 13.2,70.19 13.44,69.95 15.37,69.95 15.67,70.26 16.42,70.26 C15.2
N$13
  Bottom 0.152: R12.1 3.76,44.93 4.95,46.13 6.22,46.13 7.09,46.99 7.09,47.85 6.53,48.41 5.48,48.41 U4.9
N$26
  Bottom 0.152: R12.2 1.94,45.27 C4.2 2.86,46.85 2.21,47.5 2.21,48.71 L1.P$2
N$29
  Bottom 0.152: C7.2 16.61,20.69 U5.9
N$30
  Bottom 0.152: 21.55,20.44 L2.P$1 | U5.1 U5.2
  Bottom 0.254: U5.2 20.17,21.81 21.55,20.44
N$32
  Bottom 0.152: U7.1 19.09,32.22 18.21,31.34 16.08,31.34 15.47,31.95 15.47,32.63 L3.P$1
N$33  (via drill 0.35)
  Top 0.152: v34.47,62.43 33.54,62.43 R42.2
  Bottom 0.152: 34.48,62.45 U10.3 | 34.48,62.45 v34.47,62.43 | U10.1 34.17,66.45 33.76,66.04 33.76,63.18 34.48,62.45
N$45  (via drill 0.35)
  Top 0.152: v22.28,58.78 23.12,58.78 R43.2
  Bottom 0.152: U10.12 21.95,58.45 v22.28,58.78
N$46
  Bottom 0.152: R30.1 21.31,18.38 R31.2 19.02,19.2 18.87,19.36 18.87,20.15 U5.5
N$48
  Bottom 0.152: U7.5 20.49,33.82 C18.1
N$51  (via drill 0.35)
  Top 0.152: v22.38,56.39 23.1,56.39 R44.2
  Bottom 0.152: U10.11 22.31,56.45 v22.38,56.39
N$53
  Top 0.152: R45.1 11.96,16.1 11.71,15.85 U6.168
POWER_SEQ_EN  (via drill 0.35)
  Top 0.152: R4.2 17.13,27.24 v17.6,26.77
  Bottom 0.152: v17.6,26.77 16.42,26.77 U3.3
RST
  Top 0.152: SV1.3 58.81,64.13 55.75,67.18 47.12,67.18 46.1,66.17 46.1,64.13 45.85,63.88 45.47,63.88 U$2.7
SCL
  Top 0.254: U11.A5 56.92,32.79 59.16,35.03 61.8,35.03 62.61,35.84 62.61,39.09 64.03,40.51 65.2,40.51 J17.1
SCL1
  Top 0.152: SV1.5 52.44,63.1 50.93,61.85 44.83,61.85 44.32,62.36 44.32,63.88 44.83,64.39 45.4,64.39 U$2.6
SDA
  Top 0.254: 57.02,27.41 U11.A4 58.14,28.63 58.14,31.57 58.95,32.39 61.6,32.39 63.22,34.01 63.22,35.99 J17.2
SDA1
  Top 0.152: SV1.4 56.27,64.13 55.25,65.15 51.69,65.15 50.42,63.88 47.77,63.88 U$2.2
SDX_CLK  (via drill 0.35)
  Top 0.152: v8.71,66.6 9.02,66.6 9.27,66.85 U6.10
  Bottom 0.152: J8.5 4.06,60.43 3.68,60.81 3.68,65.79 4.65,66.75 8.56,66.75 v8.71,66.6
SDX_CMD  (via drill 0.35)
  Top 0.152: U6.12 10.34,66.24 9.22,66.24 8.81,65.84 8.81,65.33 7.24,63.75 7.24,63.09 v7.14,62.99
  Bottom 0.152: J8.3 6.77,62.63 v7.14,62.99
SDX_D0  (via drill 0.35)
  Top 0.152: v7.44,58.83 7.44,62.28 7.7,62.54 7.7,63.6 9.12,65.02 10.32,65.02 U6.16
  Bottom 0.152: J8.7 5.6,58.23 5.97,57.86 6.48,57.86 v7.44,58.83
SDX_D1  (via drill 0.35)
  Top 0.152: v8.46,58.62 8.46,61.7 8.16,62 8.16,63.48 8.48,63.8 8.56,63.8 9.22,64.46 U6.18
  Bottom 0.152: J8.8 6.96,57.13 v8.46,58.62
SDX_D2  (via drill 0.35)
  Top 0.152: v8.71,63.25 10.34,63.25 U6.22
  Bottom 0.152: J8.1 7.13,64.83 v8.71,63.25
SDX_D3  (via drill 0.35)
  Top 0.152: v8.71,62.33 9.02,62.43 9.22,62.64 10.33,62.64 U6.24
  Bottom 0.152: J8.2 7.42,63.73 v8.71,62.33
SERVO1  (via drill 0.35)
  Top 0.152: v24.51,36.98 24.11,36.93 20.7,40.34 16.28,40.34 v15.21,41.45 | v6.58,52.73 2.58,52.73 U6.45
  Bottom 0.152: JP1.1 33.55,31.14 29.95,34.75 26.75,34.75 v24.51,36.98 | v15.21,41.45 14.1,41.4 9.02,46.48 9.02,50.29 v6.58,52.73
SERVO2  (via drill 0.35)
  Top 0.152: U6.47 6.19,52.16 v6.83,51.51 | v15.11,40.54 15.67,40.49 16.18,39.98 20.45,39.98 v24.21,36.17
  Bottom 0.152: v6.83,51.51 7.24,51.51 8.66,50.09 8.66,46.33 14.1,40.89 14.76,40.89 v15.11,40.54 | v24.21,36.17 24.77,36.22 26.54,34.44 27.91,34.44 JP1.2
SERVO3  (via drill 0.35)
  Top 0.254: v68.71,16.74 68.71,13.28 68.1,12.68 67.97,12.68 67.82,12.52 66.36,12.52 65.91,12.07 64.95,12.07 J21.1
  Bottom 0.254: JP3.2 68.1,17.35 v68.71,16.74
SERVO4  (via drill 0.35)
  Top 0.178: v67.28,44.78 67.28,43.56 68.5,42.34 68.5,18.16 69.32,17.35 69.32,13.13 J20.1
  Bottom 0.254: JP3.1 67.69,49.25 66.06,47.62 66.06,46 v67.28,44.78
SPI_CS0  (via drill 0.35)
  Top 0.152: U6.27 4.27,61.76 5.05,62.54 5.05,63.96 5.05,65.79 8.05,68.78 8.05,71.37 v10.64,73.96
  Bottom 0.152: v10.64,73.96 10.64,73.07 U2.5
SPI_CS1  (via drill 0.35)
  Top 0.152: v22.63,54.41 22.63,53.96 R22.1 | v11.05,55.88 12.32,54.61 v19.18,54.61 | v1.91,56.59 1.65,56.59 0.99,57.25 0.99,62.43 1.5,62.94 2.54,62.94 U6.23
  Bottom 0.152: v22.63,54.41 22.59,54.45 U10.10 19.34,54.45 v19.18,54.61 | v11.05,55.88 6.78,55.88 6.27,56.39 2.11,56.39 v1.91,56.59
SPI_MISO  (via drill 0.35)
  Top 0.152: U6.29 4.18,61.16 5.46,62.43 5.46,65.23 v6.07,65.84 6.07,66.37 6.67,66.97 6.69,66.97 8.41,68.68 8.41,70.56 v11.91,74.07
  Bottom 0.152: v11.91,74.07 11.91,73.05 U2.6 | U10.6 25.52,56.45 22.48,59.49 15.98,59.49 10.03,65.43 9.37,65.43 8.76,66.04 6.27,66.04 v6.07,65.84
SPI_MOSI  (via drill 0.35)
  Top 0.152: U6.33 3.49,59.96 5.87,62.33 5.87,64.41 v6.88,65.43 6.88,66.04 6.63,66.29 6.63,66.4 8.81,68.58 8.81,69.6 v13.23,74.02
  Bottom 0.152: v13.23,74.02 13.23,73.05 U2.7 | U10.7 25.48,54.45 22.48,57.46 19.87,57.46 19.57,57.76 19.57,57.93 18.47,59.03 15.34,59.03 14.58,59.79 14.41,59.79 8.71,65.48 6.93,65.48 v6.88,65.43
SPI_SCLK  (via drill 0.35)
  Top 0.152: U6.35 3.5,59.36 6.33,62.18 6.33,63.75 7.85,65.28 7.85,66.7 v8.66,67.51 | v10.29,70.05 10.59,70.05 v14.55,74.02
  Bottom 0.152: v10.29,70.05 8.66,68.43 v8.66,67.51 14.66,61.52 22.43,61.52 25.5,58.45 U10.5 | v14.55,74.02 14.55,73.12 U2.8
TRIG1
  Top 0.254: J19.TRIG 45.24,47.73 44.12,46.61 44.12,30.05 U11.D2
TRIG2
  Bottom 0.254: J10.TRIG 48.46,47.7 47.17,46.41 47.17,44.58 45.75,43.16 44.73,43.16 44.32,42.75 44.32,42.34 44.12,42.14 44.12,24.97 U11.D4
TRIG3  (via drill 0.35)
  Top 0.178: J11.TRIG 50.52,47.73 50.01,47.22 50.01,45.69 49.94,45.62 49.94,43.83 49.64,43.53 49.64,42.64 50.43,41.85 50.43,40.91 49.77,40.25 49.34,40.25 48.39,39.29 48.39,19.99 v48.59,19.79
  Bottom 0.178: v48.59,19.79 46.76,19.79 U11.D6
TRIG4
  Top 0.178: J12.TRIG 53.57,47.73 52.65,46.81 52.65,45.72 52.59,45.66 52.59,43.02 53.06,42.55 53.06,27.91 49.61,24.46 49.61,19.58 47.17,17.14 47.17,16.13 46.76,15.72 46.76,14.71 U11.D8
TRIG5  (via drill 0.35)
  Top 0.178: v59.16,30.76 59.16,30.25 U11.A0
  Bottom 0.178: J13.TRIG 59.08,47.35 57.94,46.2 57.94,42.75 58.14,42.55 58.14,31.77 v59.16,30.76
TRIG6
  Top 0.178: J14.TRIG 55.3,46.61 55.3,45.67 55.28,45.66 55.28,42.96 55.7,42.55 55.7,26.7 56.52,25.88 60.48,25.88 U11.A1
TRIG7
  Bottom 0.178: J15.TRIG 61.75,47.57 60.58,46.41 60.58,42.55 62,41.12 62,24.87 U11.A2
TRIG8
  Top 0.178: J18.TRIG 64.54,47.73 65.86,46.41 65.86,43.16 67.28,41.73 67.28,28.52 63.22,24.46 63.22,23.85 62,22.63 62,22.33 U11.A3
UART2_RX  (via drill 0.35)
  Top 0.152: U6.72 12.52,44.66 v13.74,45.87 | v19.13,66.34 18.67,65.89 18.67,62.94 14.96,59.23 v14.35,59.23
  Bottom 0.152: v19.13,66.34 20.69,66.34 U10.16 | v14.35,59.23 13.74,58.62 v13.74,45.87
UART2_TX  (via drill 0.35)
  Top 0.152: U6.70 11.9,45.26 v12.62,45.97 | v13.08,59.44 13.59,59.44 v17.45,63.3
  Bottom 0.152: v12.62,45.97 12.62,58.37 | 12.62,58.37 12.62,58.47 | v17.45,63.3 18.06,63.3 19.28,64.52 20.73,64.52 U10.15 | 12.62,58.37 12.62,58.98 v13.08,59.44
UART_RX  (via drill 0.35)
  Top 0.152: U6.53 2.56,50.34 4.29,50.34 5.92,48.72 v5.92,45.41
  Bottom 0.152: J9.1 34.06,4.47 10.74,4.47 6.78,8.43 6.63,8.43 4.95,10.11 4.95,12.65 4.34,13.26 2.87,13.26 1.65,14.48 1.65,31.8 6.83,36.98 6.83,44.58 6.43,44.98 6.35,44.98 v5.92,45.41
UART_TX  (via drill 0.35)
  Top 0.152: v7.39,42.67 6.68,43.33 6.68,45.47 6.33,45.82 6.33,48.31 6.27,48.36 6.27,48.92 4.24,50.96 U6.51
  Bottom 0.152: J9.2 31.98,4.93 10.95,4.93 5.77,10.11 5.77,11.99 5.71,12.04 5.71,12.65 4.65,13.72 3.33,13.72 2.16,14.88 2.16,31.6 7.34,36.78 v7.39,42.67
USB_D_N  (via drill 0.3)
  Top 0.305: J4.2 21.2,15.46 21.89,16.15 21.89,16.82 20.4,18.31 13.18,18.31 v13.18,18.06 | v4.6,15.98 4.6,16.23 3.76,16.23 3.68,16.15 U6.167
  Bottom 0.305: v13.18,18.06 13.18,18.31 7.89,18.31 7.38,17.8 arc90 7.38,17.47 7.48,17.37 arc-90 7.48,17.04 6.76,16.32 arc-90 6.44,16.32 6.33,16.43 arc90 6.01,16.43 5.81,16.23 4.6,16.23 v4.6,15.98
USB_D_P  (via drill 0.3)
  Top 0.305: J4.3 23.2,15.31 22.35,16.15 22.35,17.01 20.59,18.77 13.18,18.77 v13.18,19.02 | v4.6,16.94 4.6,16.69 3.61,16.69 3.53,16.76 2.56,16.76 U6.165
  Bottom 0.305: v13.18,19.02 13.18,18.77 7.7,18.77 5.62,16.69 4.6,16.69 v4.6,16.94
V_BATT  (via drill 0.35)
  Top 0.254: 54.51,13.18 55.25,13.18 v55.35,13.28
  Top 0.508: C22.P$1 54.51,13.18 C21.P$1 54.89,10.9 56.41,9.37 62,9.37 62.26,9.63 62.26,21.82 63.78,23.34 J22.1
  Bottom 0.254: v55.35,13.28 54.53,13.28 54.23,13.59 53.53,13.59 | 53.53,13.59 U$1.10 | 53.53,13.59 53.53,13.75 U$1.9
VCC  (via drill 0.35)
  Top 0.152: SV1.1 63.89,62.37 62.61,61.09 v47.62,61.09 | v45.59,62.61 45.59,63.26 U$2.8
  Bottom 0.152: v47.62,61.09 46.86,61.09 45.59,62.36 v45.59,62.61
VDD
  Bottom 0.178: U$1.11 54.14,12.92 54.38,12.68 54.38,11.41 53.87,10.9 51.33,10.9 51.08,11.3 50.62,11.3 | 50.62,11.3 48.64,11.3 | U$1.1 50.57,11.36 50.62,11.3
  Bottom 0.254: R3.1 48.64,11.3 48.64,12.51 C25.1
VOUT  (via drill 0.35)
  Top 0.254: C26.1 48.48,6.88 L4.1 48.39,5.04 48.39,6.83 51.6,10.05 51.6,12.24 51.69,12.33 51.69,12.83 52.46,13.6 R1.2 52.46,14.26 53.92,15.72 v56.11,15.72
  Top 0.508: C20.+ 66.06,5.05 v67.84,6.83
  Bottom 0.254: J21.2 62.97,14.76 59.05,14.76 58.09,15.72 v56.11,15.72
  Bottom 0.508: v67.84,6.83 67.72,6.83 C23.P$2 68.1,8.1 69.11,9.12 69.11,12.93 68.35,13.69 J20.2 J21.2

## Text on the board
tPlace: GND | SERV1 | E | T | VCC | SERV2 | J10 | I2C | U1 | 5V | J9 | U9 | J11 | BATT | J12 | J13 | L1 | C2
bPlace: U2 | U10 | J8 | S2 | S1 | U8 | M1 | SERVO2 | SERVO1 | M4 | J9 | J4 | POWER
tNames: U1 | SCL | SDA | RST | GND | VCC | Central Board v2 | Batt
bNames: Apple 2.0C / Coprocessor | PID | 5V | SensA | Gimb | SensB | U4 | PEGASUS | Sensor Board A v2